# EAGLE board PICOLED (EAGLE 6.3)
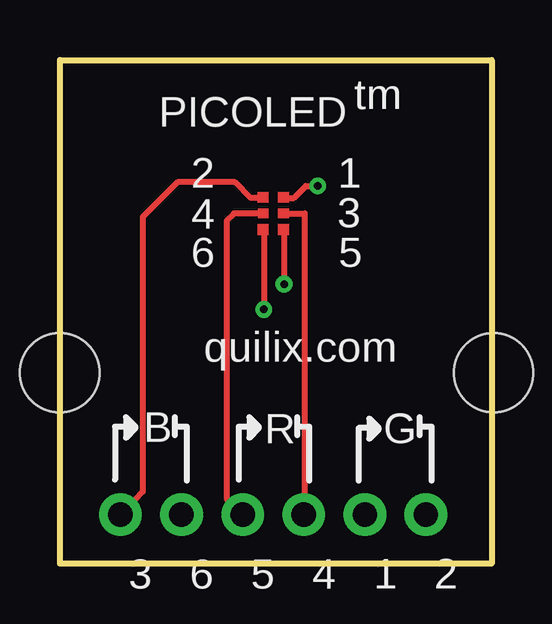
[diagram p0: board, top side]
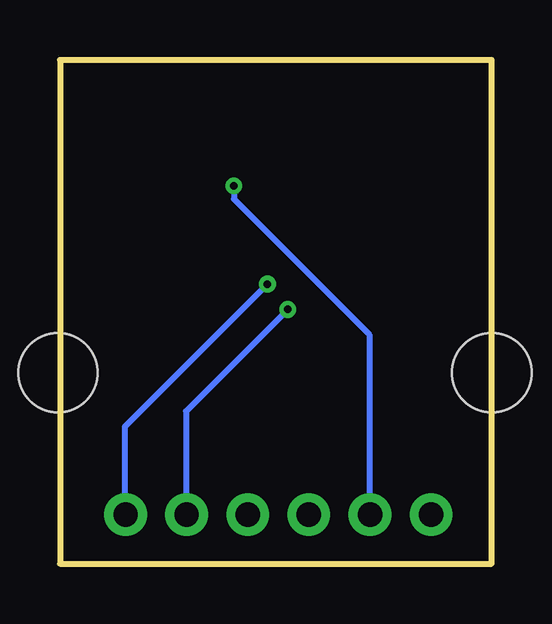
[diagram p1: board, bottom side, seen from below]

Size 18 x 21 mm. Coordinates in mm from the lower left corner, seen from the top.
Outline: 18,21 18,0 0,0 0,21 18,21
Copper layers (1*16): Top 0.035mm / dielectric 1.5mm / Bottom 0.035mm
Design rules "default *": minimum track width 10mil, minimum drill 24mil, track to track 8mil, track to pad 8mil, pad to pad 8mil, via to via 8mil, smd to smd 8mil, copper to edge 40mil, drill to drill 8mil, minimum pad ring 10mil, minimum via ring 8mil, stop-mask expansion 4mil, vias tented up to drill 0.3mm, thermal gap 10mil
tRestrict: area 8.2,13.7 to 8.7,14.1; area 8.3,14.4 to 8.7,14.8; area 8.2,15 to 8.7,15.5; area 9.1,13.7 to 9.6,14.1; area 9.1,14.4 to 9.6,14.8; area 9.1,15 to 9.6,15.5

## Footprints (pad centres in the part's own frame; a part is rotated, then mirrored left to right if it is on the bottom)
1X01-CLEANBIG = drill 1.016 pad 1.778: 1 0,0
STAND-OFF = hole 3.302: 0,0

## Placement (x,y rotation side)
1  [1X01-CLEANBIG]  12.72,2.04 180 top
2  [1X01-CLEANBIG]  15.26,2.04 180 top
3  [1X01-CLEANBIG]  2.52,2.04 180 top
4  [1X01-CLEANBIG]  10.17,2.04 180 top
5  [1X01-CLEANBIG]  7.62,2.04 180 top
6  [1X01-CLEANBIG]  5.07,2.04 180 top
JP3  STAND-OFF  [STAND-OFF]  -0.01,7.96 180 top
JP4  STAND-OFF  [STAND-OFF]  18.09,7.96 180 top

## Library data of the parts
1-6 = adafruit
JP3 JP4 = SparkFun

## Tracks (layer width: path | path; a pad name or v marks a point on that pad's centre or on a via)
S$1
  Top 0.254: 8.4,15.25 7.95,15.25 7.3,15.9 4.9,15.9 3.45,14.45 3.45,3 2.5,2
S$2  (via drill 0.3)
  Top 0.254: 9.35,15.25 9.75,15.25 10.25,15.75 v10.75,15.75
  Bottom 0.254: v10.75,15.75 10.75,15.2 5.1,9.55 5.1,2
S$3
  Top 0.254: 8.4,14.6 7.25,14.6 6.95,14.3 6.95,2.7 7.65,2
S$4
  Top 0.254: 9.4,14.6 10.2,14.6 10.2,2
S$5  (via drill 0.3)
  Top 0.254: 8.5,13.9 v8.5,10.6
  Bottom 0.254: v8.5,10.6 12.75,6.35 12.75,1.95
S$6  (via drill 0.3)
  Top 0.254: 9.35,13.9 v9.35,11.65
  Bottom 0.254: v9.35,11.65 15.3,5.7 15.3,1.9
(copper drawn outside any net)
  shapes: Top area x6

## Text on the board
_tsilk: PICOLED | tm | 2 | 1 | 4 | 3 | 6 | 5 | quilix.com | B | R | G